# Altium PCB USB Power.PcbDoc
Units mm, origin at the board's own origin, x right, y up, seen from the top; angles counter-clockwise.
Board outline 90 x 70 mm, 2 copper layers (Top Layer, Bottom Layer), stack 1.57 mm thick; 24 components, 13 nets, 56 pads, 9 vias.
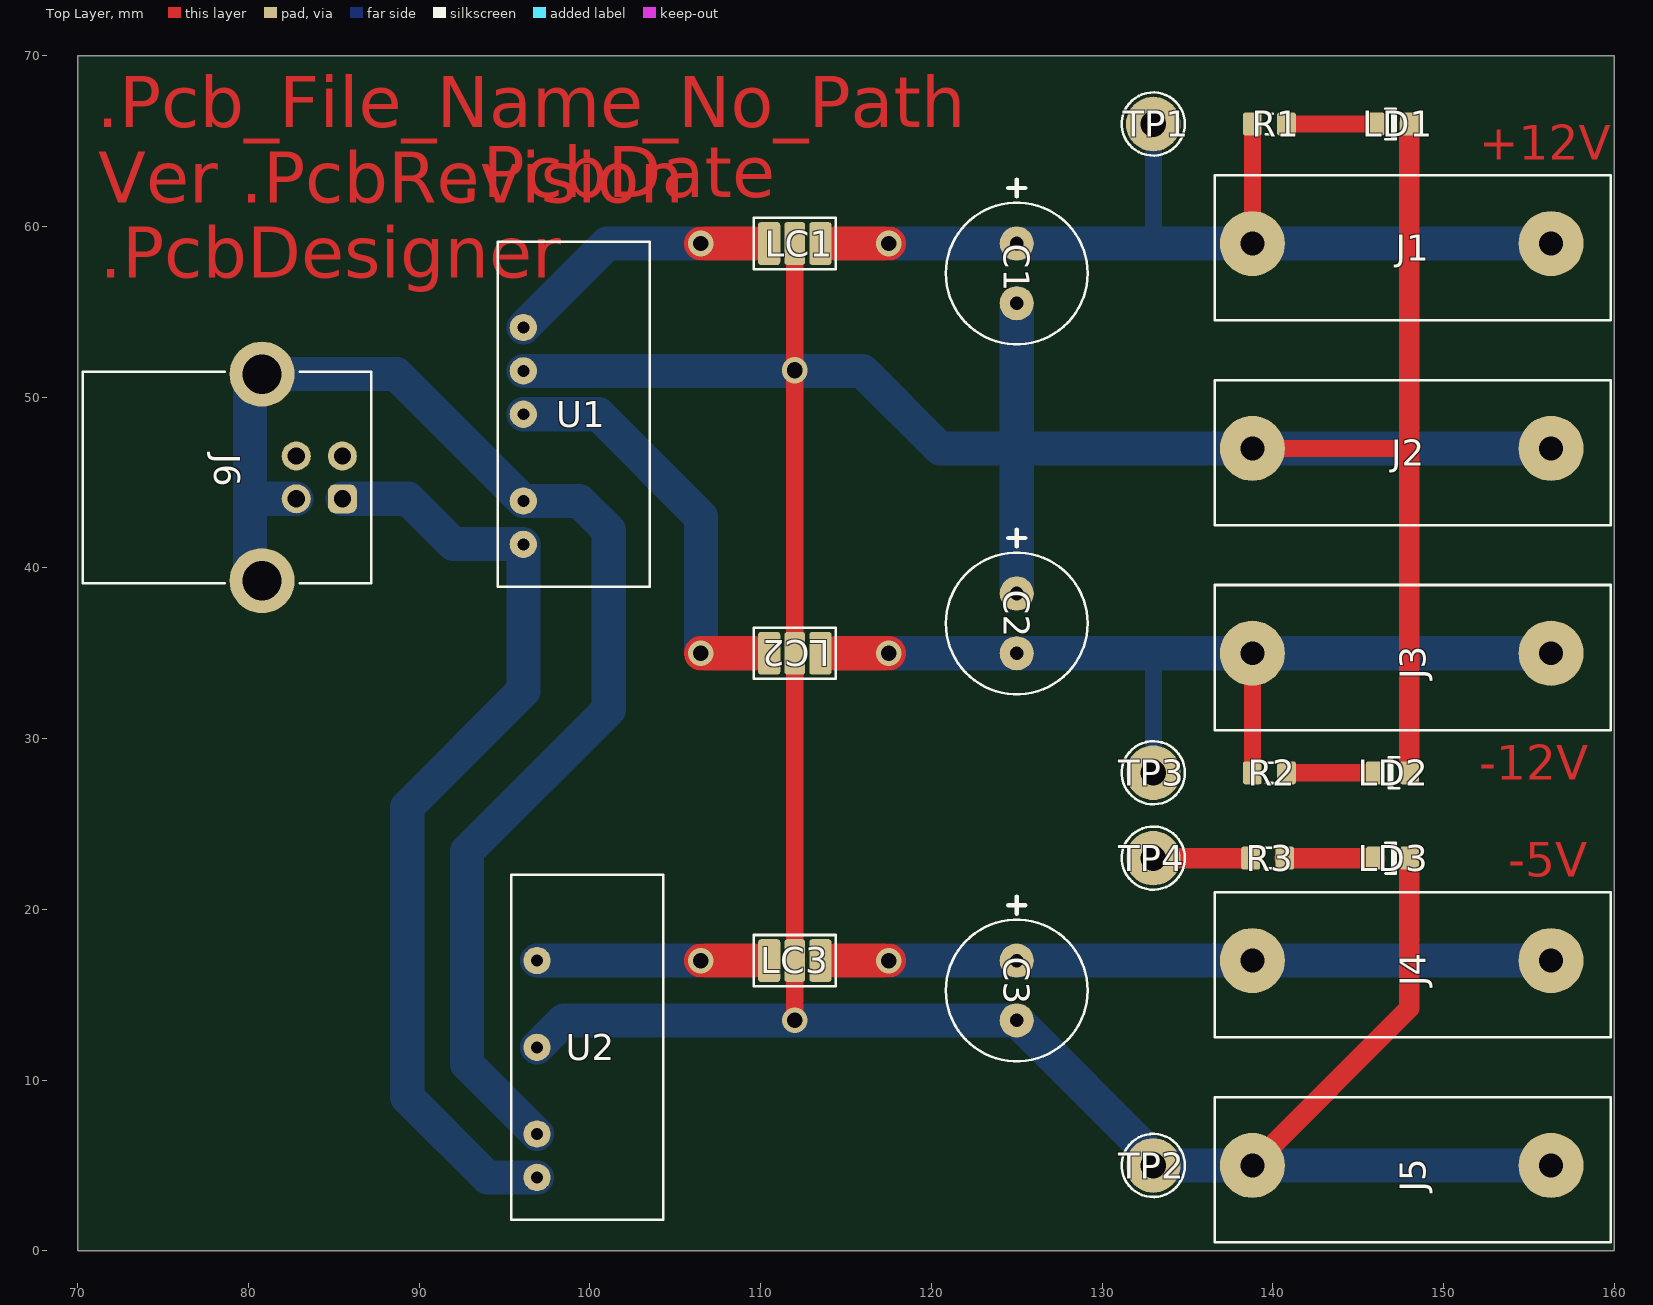
[diagram p0: Top Layer view]
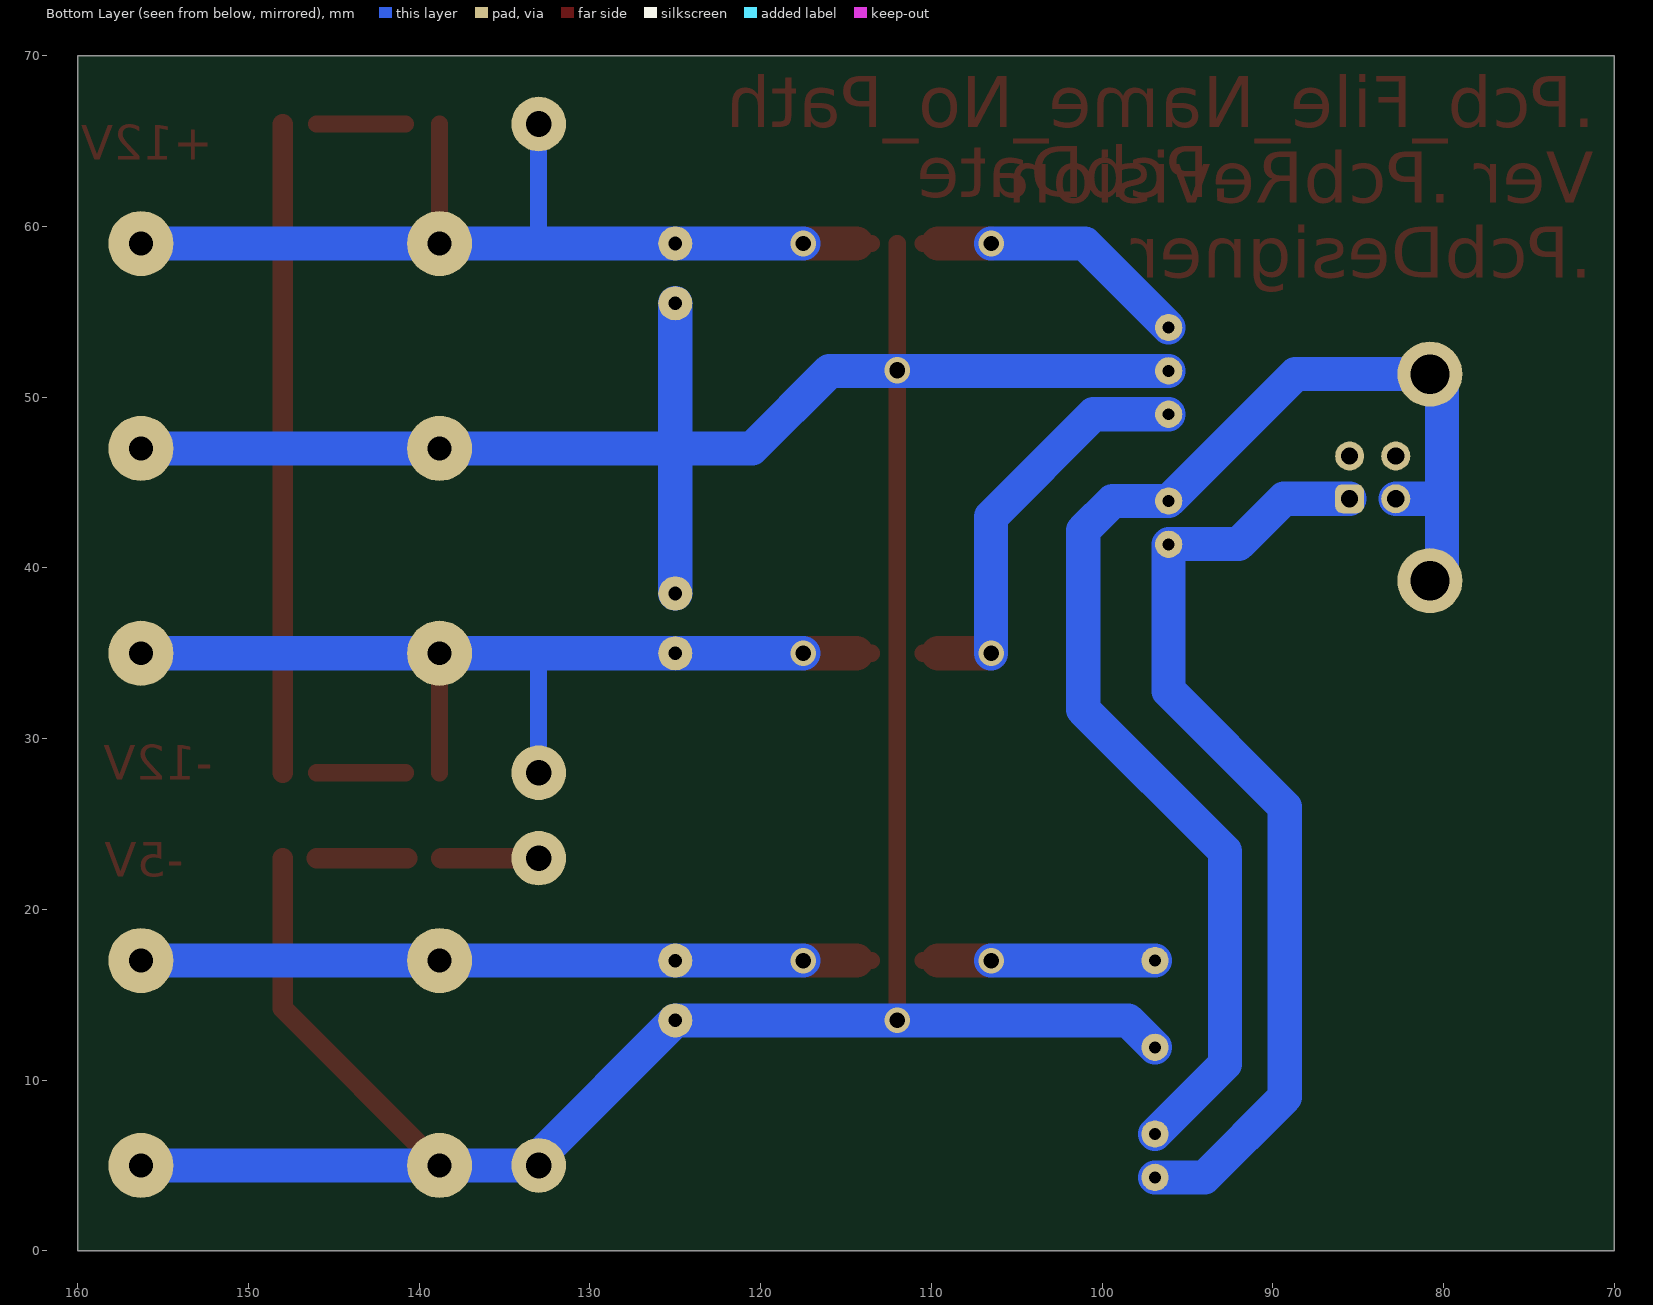
[diagram p1: Bottom Layer view, seen from below]

## Layer stack, top to bottom
Top Layer: signal copper 0.035
Dielectric 1: core 1.5, FR-4, Dk 4.2
Bottom Layer: signal copper 0.035

## Board outline
70,0 160,0 160,70 70,70

## Design rules (kind name [scope] priority, off if disabled: settings)
AcuteAngle [All] p1: minimum=9.00000000000000E+0001 checktracksonly=TRUE
AssemblyTestPointUsage [All] p1 off:
AssemblyTestpoint [All] p1 off: testpointundercomponent=TRUE minsize=1.016 maxsize=2.54 preferedsize=1.524 minholesize=0 maxholesize=1.016 preferedholesize=0.813 testpointgrid=0.025 usegrid=TRUE gridtolerance=0 allowsidetop=TRUE allowsidebottom=TRUE
BoardOutlineClearance [All] p1 off: gap=0.25
Clearance [All] p1: gap=0.25
ComponentClearance [All] p1 off: gap=0.25 collisioncheckmode=3 verticalgap=0.25 showdistances=FALSE
DiffPairsRouting [All] p1 off: maxlimit=0.254 minlimit=0.254 mostfreqgap=0.254 toplayer_minwidth=0.381 toplayer_maxwidth=0.381 toplayer_prefwidth=0.381 bottomlayer_minwidth=0.381 bottomlayer_maxwidth=0.381 bottomlayer_prefwidth=0.381 maxuncoupledlength=12.7
FabricationTestPointUsage [All] p1 off: valid=0 allowmultiple=FALSE
FabricationTestpoint [All] p1 off: side=3 testpointundercomponent=TRUE minsize=1.016 maxsize=2.54 preferedsize=1.524 minholesize=0 maxholesize=1.016 preferedholesize=0.813 testpointgrid=0.025 allowsidetop=TRUE allowsidebottom=TRUE usegrid=TRUE gridtolerance=0
FanoutControl Fanout_BGA [IsBGA] p1 off: bgadir=Out bgaviamode=Centered fanoutstyle=Auto fanoutdirection=Alternating viagrid=0.025 // Fanout_BGA (Default Rule)
FanoutControl Fanout_LCC [IsLCC] p2 off: bgadir=Out bgaviamode=Centered fanoutstyle=Auto fanoutdirection=Alternating viagrid=0.025 // Fanout_LCC (Default Rule)
FanoutControl Fanout_SOIC [IsSOIC] p3 off: bgadir=Out bgaviamode=Centered fanoutstyle=Auto fanoutdirection=Alternating viagrid=0.025 // Fanout_SOIC (Default Rule)
FanoutControl Fanout_Small [(CompPinCount < 5)] p4 off: bgadir=Out bgaviamode=Centered fanoutstyle=Auto fanoutdirection=OutThenIn viagrid=0.025 // Fanout_Small (Default Rule)
FanoutControl Fanout_Default [All] p5 off: bgadir=Out bgaviamode=Centered fanoutstyle=Auto fanoutdirection=Alternating viagrid=0.025 // Fanout_Default (Default Rule)
Height [All] p1 off: minheight=0 maxheight=25.4 prefheight=12.7
HoleSize [All] p1 off: absolutevalues=TRUE maxlimit=3 minlimit=0.15 maxpercent=80.000 minpercent=20.000
HoleToHoleClearance [All] p1 off: gap=0.25 allowstackedmicrovias=TRUE
LayerPairs [All] p1 off: enforce=TRUE
MinimumAnnularRing [All] p1 off: minimumring=0.35
MinimumSolderMaskSliver [All] p1 off: minsoldermaskwidth=0
PasteMaskExpansion [All] p1 off: expansion=0
PlaneClearance [All] p1: clearance=0.25
PlaneConnect [All] p1 off: planeconnectstyle=Relief reliefexpansion=0.5 reliefentries=4 reliefconductorwidth=0.25 reliefairgap=0.25
PolygonConnect [All] p1 off: connectstyle=Relief reliefconductorwidth=0.25 reliefentries=4 polygonreliefangle="90 Angle" airgapwidth=0.25
RoutingCorners [All] p1 off: cornerstyle=45-Degree minsetback=2.5 maxsetback=2.5
RoutingLayers [All] p1 off: top layer_v5=TRUE bottom layer_v5=TRUE
RoutingPriority [All] p1 off: routingpriority=0
RoutingTopology [All] p1 off: topology=Shortest
RoutingVias [All] p1: holewidth=0.9 width=1.5 viastyle="Through Hole" minholewidth=0.9 minwidth=1.5 maxholewidth=0.9 maxwidth=1.5
SilkToBoardRegionClearance [All] p1 off:
SilkToSilkClearance [All] p1 off: silktosilkclearance=0
SilkToSolderMaskClearance [IsPad] p1 off: minsilkscreentomaskgap=0 clearancetoexposedcopper=TRUE
SolderMaskExpansion [All] p1 off: expansion=0
Width [All] p1: maxlimit=4 minlimit=0.15 preferedwidth=0.25
4 further rules are at their usual default settings.

## Classes and differential pairs
component class "DCDC Isolator": J6 U1 U2 U?

## Components (designator, comment, footprint, x,y, rotation, side; value= is the part's Value field where it differs from the comment)
C1 "10uF" "Capacitor POL P3.5 D8.0 H13.0" 125,57.25 r270 top
C2 "10uF" "Capacitor POL P3.5 D8.0 H13.0" 125,36.75 r270 top
C3 "10uF" "Capacitor POL P3.5 D8.0 H13.0" 125,15.25 r270 top
J1 "SOCKET 4MM HIRSCHMANN" "SOCKET 4MM HIRSCHMANN 973582101 Red" 149,59 r180 top
J2 "SOCKET 4MM HIRSCHMANN" "SOCKET 4MM HIRSCHMANN 973582100 Black" 149,47 r180 top
J3 "SOCKET 4MM HIRSCHMANN" "SOCKET 4MM HIRSCHMANN 973582101 Red" 149,35 r180 top
J4 "SOCKET 4MM HIRSCHMANN" "SOCKET 4MM HIRSCHMANN 973582101 Red" 149,17 r180 top
J5 "SOCKET 4MM HIRSCHMANN" "SOCKET 4MM HIRSCHMANN 973582100 Black" 149,5 r180 top
J6 "USB-B-TH-AMPHENOL UE27-BC54-130" "USB-B TH AMPHENOL UE27-BC54-130" 70.5,45.3 r270 top
LC1 "NFE31PT222Z1E9L" NFE31P 112,59 r0 top
LC2 "NFE31PT222Z1E9L" NFE31P 112,35 r180 top
LC3 "NFE31PT222Z1E9L" NFE31P 112,17 r0 top
LD1 "Green" "LED 2012 REFLOW" 147,66 r180 top
LD2 "Green" "LED 2012 REFLOW" 147,28 r0 top
LD3 "Green" "LED 2012 REFLOW" 147,23 r180 top
R1 "2k" "RESISTOR 2012 REFLOW" 139.8,66 r0 top
R2 "2k" "RESISTOR 2012 REFLOW" 139.8,28 r0 top
R3 "620R" "RESISTOR 2012 REFLOW" 139.7,23 r0 top
TP1 "*" "Test Point Keystone Compact RED" 133,66 r0 top
TP2 "*" "Test Point Keystone Compact BLACK" 133,5 r0 top
TP3 "*" "Test Point Keystone Compact RED" 133,28 r0 top
TP4 "*" "Test Point Keystone Compact RED" 133,23 r0 top
U1 "TMA0512D" "TRACO TMA DUAL" 99,49 r90 top
U2 "TMA0505S" "TRACO TMA SINGLE" 99.8,11.92 r90 top

## Footprints (in the part's own frame and the unit in brackets; to place one, negate y for a bottom-side part, rotate by r counter-clockwise, add the part's x,y. Pads: shape width x height; smd on the part's side, far side on the other; paste and mask are expansions set on the pad)
"Capacitor POL P3.5 D8.0 H13.0" [mm] "Capacitor Electrolyte Polarized Pitch 3.5mm, Diameter 8mm, Height 13mm"
  round 2 hole 0.8: 1(-1.75,0) 2(1.75,0)
  silkscreen extent -5.5,-4.15 4.15,4.15, body extent -4,-4 4.05,4, height 13.05
"LED 2012 REFLOW" [mm] "LED SMD 2.0x1.2mm (0805-imperial)"
  rrect25% 1.1x1.35 smd: 1(-1,0) 2(1,0)
  silkscreen extent -0.2,-0.9 0.4,0.9, body extent -1,-0.6 1,0.6, height 0.6
NFE31P [mm] "EMI Suppression Filters"
  rrect25% 1.3x2.5 smd: 1(-1.5,0) 3(1.5,0)
  rrect25% 1.2x2.5 smd: 2(0,0)
  silkscreen extent -2.4,-1.5 2.4,1.5, body extent -1.6,-0.87 1.6,0.87, height 1.6
"RESISTOR 2012 REFLOW" [mm] "Resistor SMD 2.0x1.2mm (0805-imperial)"
  rrect25% 1.1x1.35 smd: 1(-1,0) 2(1,0)
  silkscreen extent -0.2,-0.6 0.2,0.6, body extent -1,-0.6 1,0.6, height 0.6
"SOCKET 4MM HIRSCHMANN 973582100 Black" [mm] "SOCKET 4MM HIRSCHMANN 973582100, Case 21x7.5, Pitch 17.5, Height 10.5, Black"
  round 3.81 hole 1.4: 1(-7.3,0) 1(10.2,0)
  silkscreen extent -10.8,-4 12.4,4.5, body extent -10.5,-3.75 10.5,4.25, height 10.5
"SOCKET 4MM HIRSCHMANN 973582101 Red" [mm] "SOCKET 4MM HIRSCHMANN 973582101, Case 21x7.5, Pitch 17.5, Height 10.5, Red"
  round 3.81 hole 1.4: 1(-7.3,0) 1(10.2,0)
  silkscreen extent -10.8,-4 12.4,4.5, body extent -10.5,-3.75 10.5,4.25, height 10.5
"Test Point Keystone Compact BLACK" [mm] "Test Point Keystone Compact BLACK"
  round 3.2 hole 1.5: 1(0,0)
  silkscreen extent -1.85,-1.85 1.85,1.85, body extent -1.65,-1.65 1.65,1.65, height 5.5
"Test Point Keystone Compact RED" [mm] "Test Point Keystone Compact"
  round 3.2 hole 1.5: 1(0,0)
  silkscreen extent -1.85,-1.85 1.85,1.85, body extent -1.65,-1.65 1.65,1.65, height 5.5
"TRACO TMA DUAL" [mm] "DC/DC Converter"
  round 1.6 hole 0.7: 1(-7.62,2.9) 2(-5.08,2.9) 4(0,2.9) 5(2.54,2.9) 6(5.08,2.9)
  silkscreen extent -10.1,-4.5 10.1,4.4, body extent -9.8,-4.2 9.8,4.2, height 10.2
"TRACO TMA SINGLE" [mm] "DC/DC Converter"
  round 1.6 hole 0.7: 1(-7.62,2.9) 2(-5.08,2.9) 4(0,2.9) 6(5.08,2.9)
  silkscreen extent -10.1,-4.5 10.1,4.4, body extent -9.8,-4.2 9.8,4.2, height 10.2
"USB-B TH AMPHENOL UE27-BC54-130" [mm] "USB-B TH AMPHENOL UE27-BC54-130"
  rrect50% 1.7x1.7 hole 1: 1(1.25,15)
  round 1.7 hole 1: 2(-1.25,15) 3(-1.25,12.3) 4(1.25,12.3)
  round 3.81 hole 2.3: 5(-6.05,10.3) 6(6.05,10.3)
  silkscreen extent -6.2,-0.2 6.2,16.7, body extent -6.3,-0.1 6.3,16.5, height 10.6

## Part data
C1 C2 C3: library part "Capacitor Polarized", "Capacitor polarized"
LC1 LC2 LC3: library part NFE31P, "EMI Suppression Filters"
LD1 LD2 LD3: library part LED, "LED generic"
R1 R2 R3: library part Resistor, "Resistor"
TP1 TP2 TP3 TP4: library part "Test Point", "Test Point"
U1: library part "TRACO TMA DUAL", "DC/DC Converter"
U2: library part "TRACO TMA SINGLE", "DC/DC Converter"

## Via types
v1: diameter 1.5, hole 0.9, Top Layer to Bottom Layer, 9 vias

## Nets (pads, with @x,y where several pads share a name; then routed paths per layer and width w, separated by ;. In a path a pad name is that pad's centre, name@x,y a point inside that pad or via, vN(x,y) a via of type N, cw(c..) or ccw(c..) an arc to the next point about the centre after c; other vN are vias at no path point)
0V: C1.2 C2.1 C3.2 J2.1 J5.1 LC1.2 LC2.2 LC3.2 LD1.1 LD2.2 LD3.1 TP2.1 U1.5 U2.4 | length 257.4
  Top Layer w1: v1(112,13.5) LC3.2 ; LC3.2@112,17.2 v1(112,51.54) v1(112,51.6) LC1.2 ; J2.1@138.8,47 147.9,47 148,47.1
  Top Layer w1.2: J5.1@138.8,5 148,14.2 LD3.1 ; LD2.2 148,47.1 LD1.1
  Bottom Layer w1: v1(112,51.54) v1(112,51.6)
  Bottom Layer w2: U1.5 v1(112,51.54) 115.96,51.54 120.5,47 125,47 ; U2.4 98.48,13.5 v1(112,13.5) C3.2 133,5.5 TP2.1 138.8,5 J5.1@156.3,5 ; C2.1 125,47 ; C1.2 125,47 ; J2.1@156.3,47 138.8,47 125,47
"+5V OUT": R3.1 TP4.1 | length 5.7
  Top Layer w1.2: TP4.1 R3.1
+12V: LC1.1 U1.6 | length 16.4
  Top Layer w1: 109.6,59 LC1.1
  Top Layer w2: v1(106.5,59) 109.6,59
  Bottom Layer w2: U1.6 101.02,59 v1(106.5,59)
"+12V OUT": C1.1 J1.1 LC1.3 R1.1 TP1.1 | length 56.8
  Top Layer w1: LC1.3 114.4,59 ; J1.1@138.8,59 R1.1
  Top Layer w2: 114.4,59 v1(117.5,59)
  Bottom Layer w1: 132.9,59 133,59.1 TP1.1
  Bottom Layer w2: v1(117.5,59) 132.9,59 138.8,59 J1.1@156.3,59
-12V: LC2.3 U1.4 | length 24.9
  Top Layer w1: 109.6,35 LC2.3
  Top Layer w2: v1(106.5,35) 109.6,35
  Bottom Layer w2: U1.4 100.5,49 106.5,43 v1(106.5,35)
"-12V OUT": C2.2 J3.1 LC2.1 R2.1 TP3.1 | length 56.8
  Top Layer w1: LC2.1 114.4,35 ; R2.1 J3.1@138.8,35
  Top Layer w2: 114.4,35 v1(117.5,35)
  Bottom Layer w1: 132.9,35 133,34.9 TP3.1
  Bottom Layer w2: v1(117.5,35) C2.2 132.9,35 138.8,35 J3.1@156.3,35
GND: J6.4 J6.5 J6.6 U1.2 U2.2 | length 80
  Bottom Layer w2: J6.6 80.1,39.95 80.1,44.2 ; J6.4 80.25,44.05 80.1,44.2 ; U2.2 92.8,10.94 92.8,23.4 101.1,31.7 101.1,42.2 99.38,43.92 U1.2 88.67,51.35 J6.5 80.1,50.65 80.1,44.2
NetC3_1: C3.1 J4.1 LC3.3 | length 42.8
  Top Layer w1: LC3.3 114.4,17
  Top Layer w2: 114.4,17 v1(117.5,17)
  Bottom Layer w2: v1(117.5,17) C3.1 138.8,17 J4.1@156.3,17
NetJ6_1: J6.1 U1.1 U2.1 | length 56.4
  Bottom Layer w2: J6.1 89.35,44.05 92,41.4 96.08,41.4 U1.1 96.1,32.8 89.3,26 89.3,9 94,4.3 U2.1
NetLC3_1: LC3.1 U2.6 | length 13.6
  Top Layer w1: 109.6,17 LC3.1
  Top Layer w2: v1(106.5,17) 109.6,17
  Bottom Layer w2: U2.6 v1(106.5,17)
NetLD1_2: LD1.2 R1.2 | length 5.2
  Top Layer w1: R1.2 LD1.2
NetLD2_1: LD2.1 R2.2 | length 5.2
  Top Layer w1: R2.2 LD2.1
NetLD3_2: LD3.2 R3.2 | length 5.3
  Top Layer w1.2: R3.2 LD3.2
pads on no net: J6.2 J6.3

## Other copper
Top Layer:
  text ".Pcb_File_Name_No_Path" at 71.1,65.8 h3
  text "+12V" at 152.1,63.9 h2
  text ".PcbDate" at 92.4,61.7 h3
  text "Ver .PcbRevision" at 71.2,61.4 h3
  text ".PcbDesigner" at 71.3,57 h3
  text "-12V" at 152.1,27.6 h2
  text "-5V" at 153.8,21.9 h2

## Silkscreen, mask and mechanical layers (free items; w line width, h text height)
Mechanical 1:
  the board outline again, w0.15